# EAGLE board project (EAGLE 9.3.0)
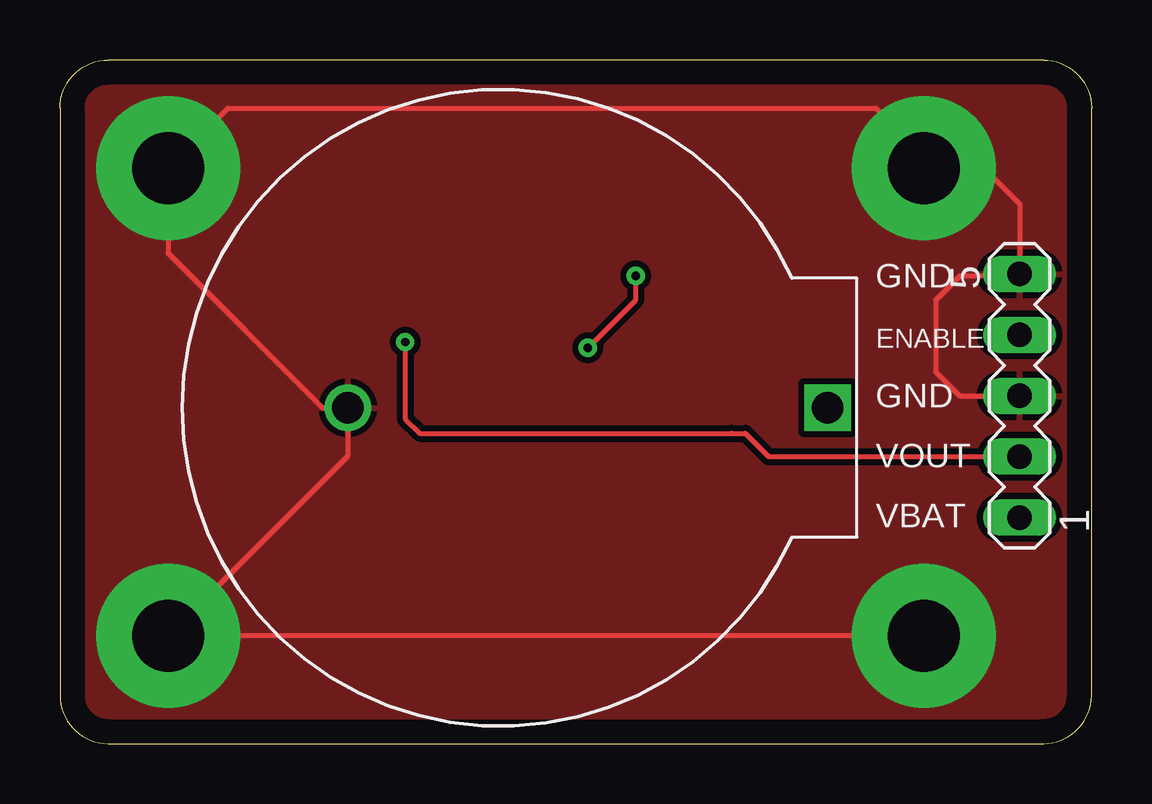
[diagram p0: board, top side]
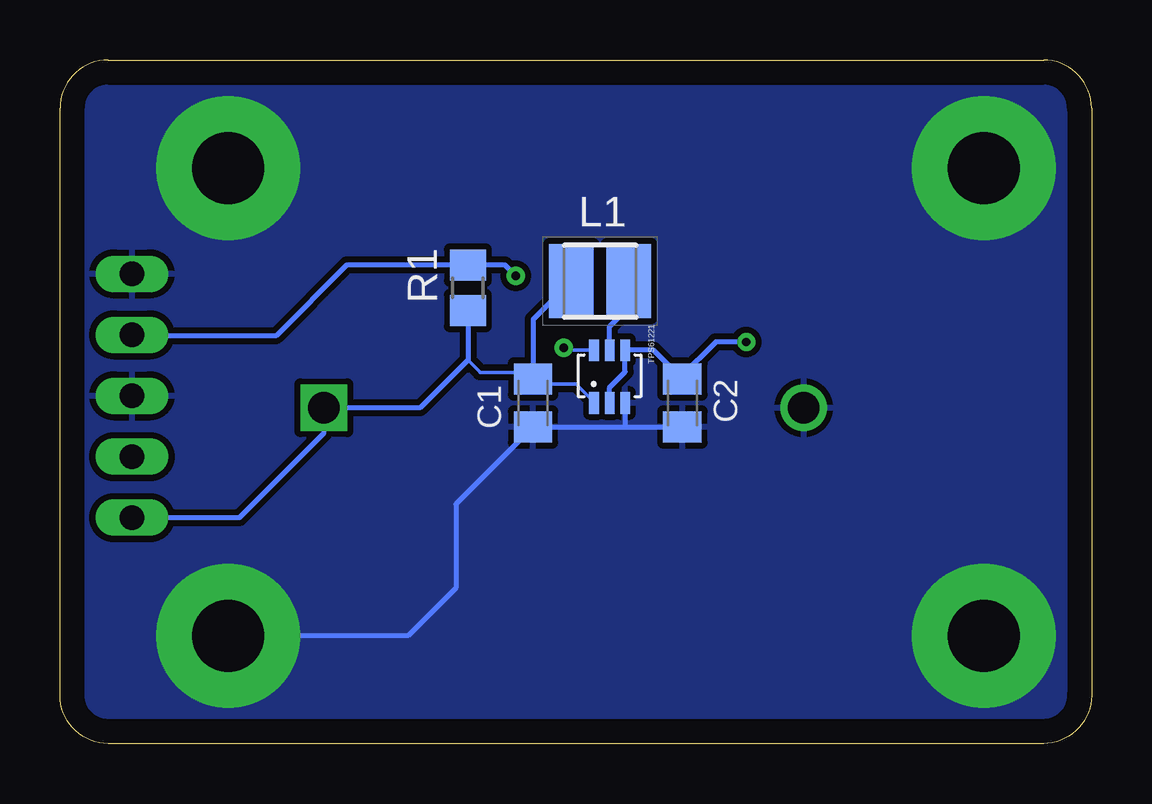
[diagram p1: board, bottom side, seen from below]

Size 43 x 28.5 mm. Coordinates in mm from the lower left corner, seen from the top.
Outline: 2,0 41,0 arc90 43,2 43,26.5 arc90 41,28.5 2,28.5 arc90 0,26.5 0,2 arc90 2,0
Copper layers (1*16): Top 0.035mm / dielectric 1.5mm / Bottom 0.035mm
Design rules "default *": minimum track width 6mil, minimum drill 0.35mm, track to track 6mil, track to pad 6mil, pad to pad 6mil, via to via 6mil, smd to smd 6mil, copper to edge 40mil, drill to drill 6mil, minimum pad ring 10mil, minimum via ring 8mil, stop-mask expansion 4mil, vias tented up to drill 0mil, thermal gap 10mil

## Footprints (pad centres in the part's own frame; a part is rotated, then mirrored left to right if it is on the bottom)
79578211 = drill 1.3 square: 1 0,0 | drill 1.3: 2 20,0
C0805K = smd 1.3 x 1.6: 1 -1,0; 2 1,0
INDPM3030X120N = smd 1.85 x 3.1: 1 -1.2,0; 2 1.2,0
R0805 = smd 1.3 x 1.5: 1 -0.95,0; 2 0.95,0
MA05-1 = drill 1.016 long: 1 -5.08,0; 2 -2.54,0; 3 0,0; 4 2.54,0; 5 5.08,0
TPS61221 = smd 0.9 x 0.4: P$1 0,0; P$2 0,-0.65; P$3 0,-1.3; P$4 2.2,-1.3; P$5 2.2,-0.65; P$6 2.2,0

## Placement (x,y rotation side)
BT2  79578211  [79578211]  32,14 180 top
C1  10u  [C0805K]  23.28,14.2 270 bottom
C2  10u  [C0805K]  17.06,14.2 270 bottom
L1  LQH3NPN2R2MJRL  [INDPM3030X120N]  20.49,19.28 0 bottom
R1  1M  [R0805]  26,19 90 bottom
SV2  [MA05-1]  40,14.5 90 top
U$1  TPS61221  [TPS61221]  20.74,14.2 90 bottom

## Library data of the parts
BT2 = Battery Holder; CREATED_BY: PCBLayout.com; DIGIKEY_PART_NO: 732-12330-ND; MANUFACTURER: Wurth Electronics Inc.; MPN: 79578211
C1 C2 = rcl; SPICEPREFIX: C
L1 = LQH3NPN2R2MJRL; DESCRIPTION: LQH3NPN_JR Series Inductor 2.2uH +/-20% 1212 (3030); HEIGHT: 1.2mm; MANUFACTURER_NAME: Murata Electronics; MANUFACTURER_PART_NUMBER: LQH3NPN2R2MJRL; MOUSER_PART_NUMBER: 81-LQH3NPN2R2MJRL; MOUSER_PRICE-STOCK: https://www.mouser.com/Search/Refine.aspx?Keyword=81-LQH3NPN2R2MJRL
R1 = rcl; SPICEPREFIX: R
SV2 = con-lstb; OC_FARNELL: unknown; OC_NEWARK: unknown
U$1 = TPS61221; AVAILABILITY: Unavailable; DESCRIPTION: the tps6122x family devices provide a power-supply solution for products powered by either a single-cell two-cell or ...; MF: Texas Instruments; MP: TPS61221; PACKAGE: SC-70 Texas Instruments; PRICE: None

## Nets
EN: R1.2 SV2.4 U$1.P$6
GND: BT2.2 C1.2 C2.2 SV2.3 SV2.5 U$1.P$3
N$3: L1.2 U$1.P$5
OUT: C2.1 SV2.2 U$1.P$2 U$1.P$4
VBAT: BT2.1 C1.1 L1.1 R1.1 SV2.1 U$1.P$1

## Tracks (layer width: path | path; a pad name or v marks a point on that pad's centre or on a via)
EN  (via drill 0.35)
  Top 0.2: v24,19.5 24,18.5 v22,16.5
  Bottom 0.152: U$1.P$6 21.9,16.4 v22,16.5
  Bottom 0.2: v24,19.5 24.45,19.95 R1.2 31.05,19.95 34,17 39.96,17 SV2.4
GND  (via drill 3 pad 6)
  Top 0.2: v36,24 36.5,24 | 36.5,24 38.5,24 40,22.5 SV2.5 39.92,19.5 37.5,19.5 36.5,18.5 36.5,15.5 37.5,14.5 SV2.3 | v36,4.5 v4.5,4.5 12,12 BT2.2 10.94,14 4.5,20.44 v4.5,24 7,26.5 34,26.5 36.5,24
  Bottom 0.2: C1.2 26.5,9.98 26.5,6.5 28.5,4.5 v36,4.5
  Bottom 0.203: C1.2 19.47,13.2 | 19.47,13.2 C2.2 | U$1.P$3 19.44,13.23 19.47,13.2
  pour Top (isolate 0.254): 0.5,28.5 42,28.5 43,27.5 43,0.5 42.5,0 1,0 0,1 0,28
  pour Bottom (isolate 0.254): 0,28.5 42,28.5 43,27.5 43,1 42,0 1,0 0,1
N$3
  Bottom 0.203: U$1.P$5 20.09,17.39 19.29,18.19 L1.2
OUT  (via drill 0.35)
  Top 0.2: SV2.2 29.54,11.96 28.57,12.93 28,12.93 | v14.39,16.74 14.39,13.54 15,12.93
  Top 0.203: 15,12.93 28,12.93
  Bottom 0.203: C2.1 17.13,15.27 | 17.13,15.27 18.26,16.4 U$1.P$4 19.44,15.5 20.09,14.85 U$1.P$2 | v14.39,16.74 15.66,16.74 17.13,15.27
VBAT
  Bottom 0.152: U$1.P$1 20.74,14.24 21.5,15 23.08,15 C1.1 23.55,15.47 25.5,15.47 25.5,15.5 26,16
  Bottom 0.2: R1.1 26,16 28,14 BT2.1 32,12.94 35.52,9.42 SV2.1
  Bottom 0.203: L1.1 23.28,17.69 C1.1

## Text on the board
tPlace: GND | ENABLE | GND | VOUT | VBAT
200bmp: Produced by / Makerfabs